# EAGLE board LEDARRAY (EAGLE 8.6.0)
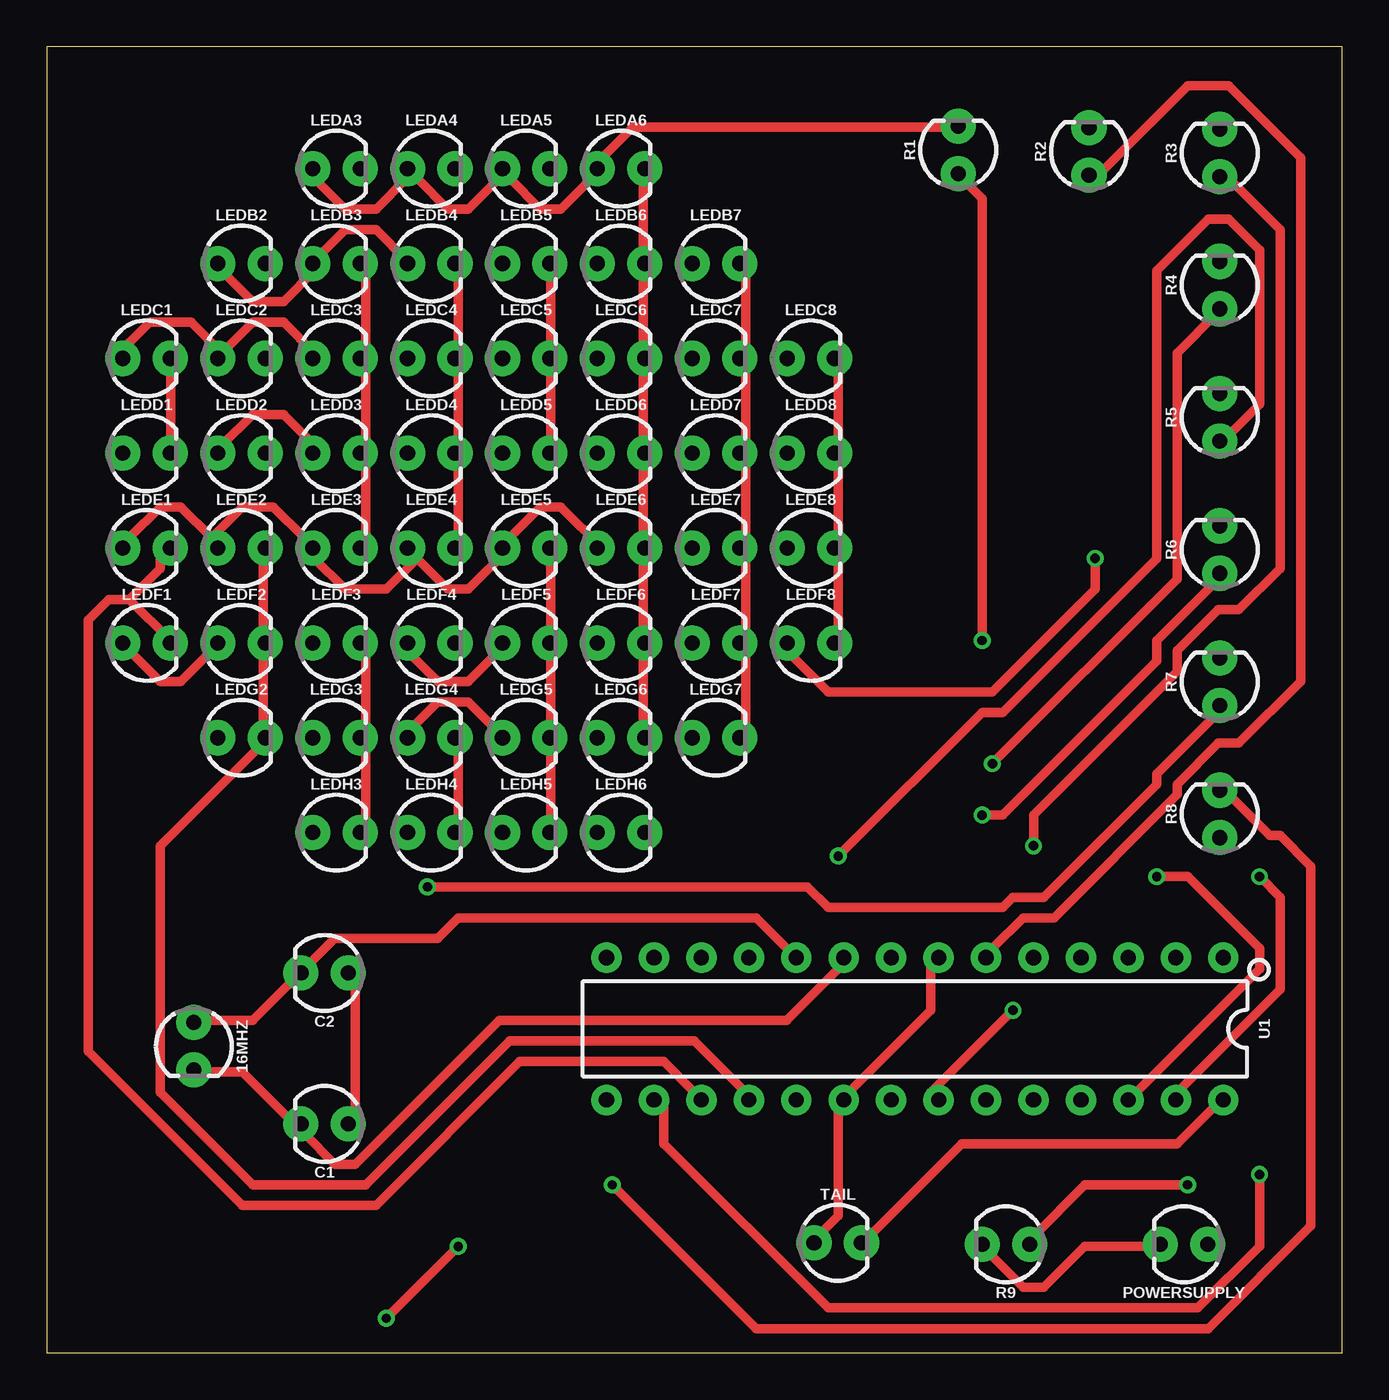
[diagram p0: board, top side]
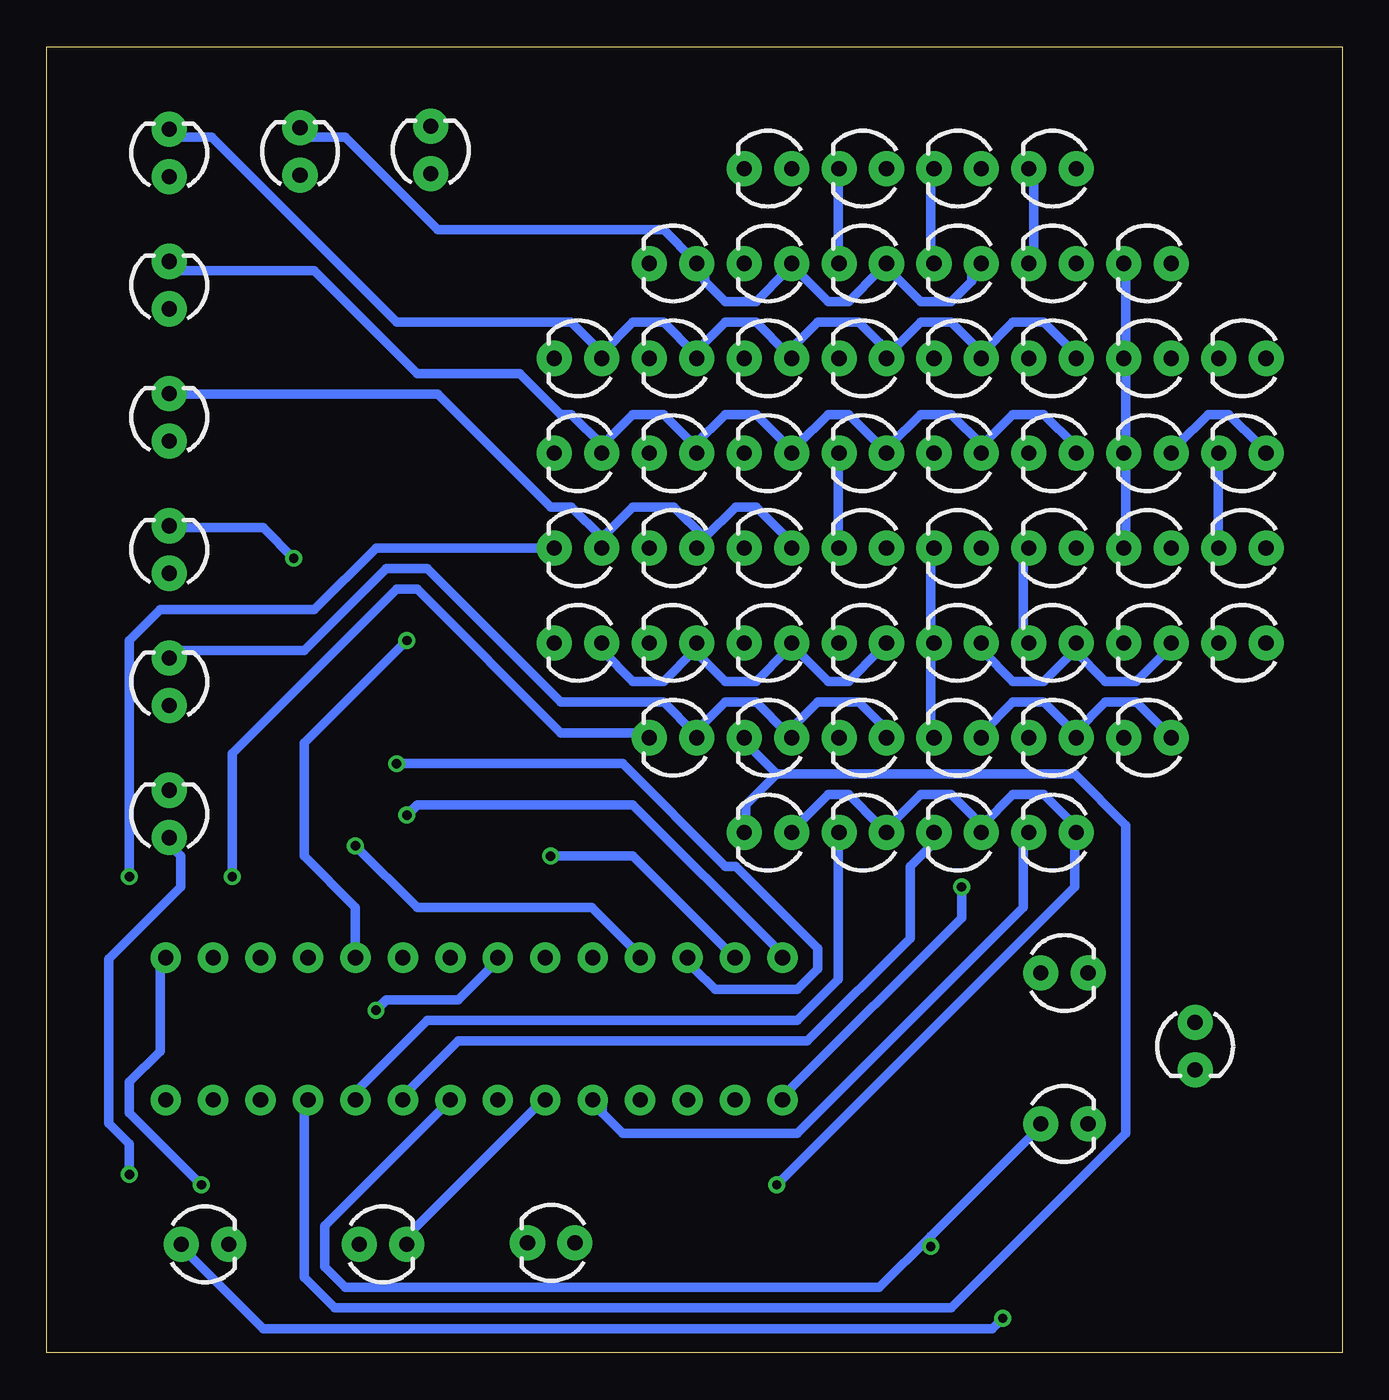
[diagram p1: board, bottom side, seen from below]

Size 69.36 x 69.95 mm. Coordinates in mm from the lower left corner, seen from the top.
Outline: 0,0 69.36,0 69.36,69.95 0,69.95 0,0
Copper layers (1*16): Top 0.035mm / dielectric 1.5mm / Bottom 0.035mm
Design rules "default *": minimum track width 0.5mm, minimum drill 0.5mm, track to track 0.6mm, track to pad 0.6mm, pad to pad 0.6mm, via to via 1.5mm, smd to smd 1mm, copper to edge 40mil, drill to drill 6mil, minimum pad ring 10mil, minimum via ring 8mil, stop-mask expansion 4mil, vias tented up to drill 0mil, thermal gap 10mil

## Footprints (pad centres in the part's own frame; a part is rotated, then mirrored left to right if it is on the bottom)
LED_3MM = drill 0.813 pad 1.88: A -1.27,0; K 1.27,0
DIP28 = drill 0.813 pad 1.626: 1 -16.51,-3.81; 2 -13.97,-3.81; 3 -11.43,-3.81; 4 -8.89,-3.81; 5 -6.35,-3.81; 6 -3.81,-3.81; 7 -1.27,-3.81; 8 1.27,-3.81; 9 3.81,-3.81; 10 6.35,-3.81; 11 8.89,-3.81; 12 11.43,-3.81; 13 13.97,-3.81; 14 16.51,-3.81; 15 16.51,3.81; 16 13.97,3.81; 17 11.43,3.81; 18 8.89,3.81; 19 6.35,3.81; 20 3.81,3.81; 21 1.27,3.81; 22 -1.27,3.81; 23 -3.81,3.81; 24 -6.35,3.81; 25 -8.89,3.81; 26 -11.43,3.81; 27 -13.97,3.81; 28 -16.51,3.81

## Placement (x,y rotation side)
16MHZ  [LED_3MM]  7.88,16.42 270 top
C1  [LED_3MM]  14.88,12.26 180 top
C2  [LED_3MM]  14.88,20.34 180 top
LEDA3  [LED_3MM]  15.51,63.42 0 top
LEDA4  [LED_3MM]  20.59,63.42 0 top
LEDA5  [LED_3MM]  25.67,63.42 0 top
LEDA6  [LED_3MM]  30.75,63.42 0 top
LEDB2  [LED_3MM]  10.43,58.34 0 top
LEDB3  [LED_3MM]  15.51,58.34 0 top
LEDB4  [LED_3MM]  20.59,58.34 0 top
LEDB5  [LED_3MM]  25.67,58.34 0 top
LEDB6  [LED_3MM]  30.75,58.34 0 top
LEDB7  [LED_3MM]  35.83,58.34 0 top
LEDC1  [LED_3MM]  5.35,53.26 0 top
LEDC2  [LED_3MM]  10.43,53.26 0 top
LEDC3  [LED_3MM]  15.51,53.26 0 top
LEDC4  [LED_3MM]  20.59,53.26 0 top
LEDC5  [LED_3MM]  25.67,53.26 0 top
LEDC6  [LED_3MM]  30.75,53.26 0 top
LEDC7  [LED_3MM]  35.83,53.26 0 top
LEDC8  [LED_3MM]  40.91,53.26 0 top
LEDD1  [LED_3MM]  5.35,48.18 0 top
LEDD2  [LED_3MM]  10.43,48.18 0 top
LEDD3  [LED_3MM]  15.51,48.18 0 top
LEDD4  [LED_3MM]  20.59,48.18 0 top
LEDD5  [LED_3MM]  25.67,48.18 0 top
LEDD6  [LED_3MM]  30.75,48.18 0 top
LEDD7  [LED_3MM]  35.83,48.18 0 top
LEDD8  [LED_3MM]  40.91,48.18 0 top
LEDE1  [LED_3MM]  5.35,43.1 0 top
LEDE2  [LED_3MM]  10.43,43.1 0 top
LEDE3  [LED_3MM]  15.51,43.1 0 top
LEDE4  [LED_3MM]  20.59,43.1 0 top
LEDE5  [LED_3MM]  25.67,43.1 0 top
LEDE6  [LED_3MM]  30.75,43.1 0 top
LEDE7  [LED_3MM]  35.83,43.1 0 top
LEDE8  [LED_3MM]  40.91,43.1 0 top
LEDF1  [LED_3MM]  5.35,38.02 0 top
LEDF2  [LED_3MM]  10.43,38.02 0 top
LEDF3  [LED_3MM]  15.51,38.02 0 top
LEDF4  [LED_3MM]  20.59,38.02 0 top
LEDF5  [LED_3MM]  25.67,38.02 0 top
LEDF6  [LED_3MM]  30.75,38.02 0 top
LEDF7  [LED_3MM]  35.83,38.02 0 top
LEDF8  [LED_3MM]  40.91,38.02 0 top
LEDG2  [LED_3MM]  10.43,32.94 0 top
LEDG3  [LED_3MM]  15.51,32.94 0 top
LEDG4  [LED_3MM]  20.59,32.94 0 top
LEDG5  [LED_3MM]  25.67,32.94 0 top
LEDG6  [LED_3MM]  30.75,32.94 0 top
LEDG7  [LED_3MM]  35.83,32.94 0 top
LEDH3  [LED_3MM]  15.51,27.86 0 top
LEDH4  [LED_3MM]  20.59,27.86 0 top
LEDH5  [LED_3MM]  25.67,27.86 0 top
LEDH6  [LED_3MM]  30.75,27.86 0 top
POWERSUPPLY  [LED_3MM]  60.88,5.81 180 top
R1  [LED_3MM]  48.8,64.42 90 top
R2  [LED_3MM]  55.8,64.34 90 top
R3  [LED_3MM]  62.8,64.26 90 top
R4  [LED_3MM]  62.8,57.18 90 top
R5  [LED_3MM]  62.8,50.1 90 top
R6  [LED_3MM]  62.8,43.02 90 top
R7  [LED_3MM]  62.8,35.94 90 top
R8  [LED_3MM]  62.8,28.86 90 top
R9  [LED_3MM]  51.35,5.81 180 top
TAIL  [LED_3MM]  42.35,5.89 0 top
U1  328P  [DIP28]  46.48,17.35 180 top

## Library data of the parts
16MHZ C1 C2 LEDA3-LEDA6 LEDB2-LEDB7 LEDC1-LEDC8 LEDD1-LEDD8 LEDE1-LEDE8 LEDF1-LEDF8 LEDG2-LEDG7 LEDH3-LEDH6 POWERSUPPLY R1-R9 TAIL = SparkFun-LED; PROD_ID: DIO-08794
U1 = SparkFun-IC-Microcontroller; PROD_ID: IC-09136

## Nets
LEDD1: LEDC1.K LEDD1.K LEDE1.K LEDF1.K U1.17
N$1: LEDC1.A LEDC2.A LEDC3.A LEDC4.A LEDC5.A LEDC6.A LEDC7.A LEDC8.A R3.K
N$2: LEDG2.A LEDG3.A LEDG4.A LEDG5.A LEDG6.A LEDG7.A R7.K
N$3: LEDF1.A LEDF2.A LEDF3.A LEDF4.A LEDF5.A LEDF6.A LEDF7.A LEDF8.A R6.K
N$4: R8.A U1.16
N$5: LEDD1.A LEDD2.A LEDD3.A LEDD4.A LEDD5.A LEDD6.A LEDD7.A LEDD8.A R4.K
N$6: LEDE1.A LEDE2.A LEDE3.A LEDE4.A LEDE5.A LEDE6.A LEDE7.A LEDE8.A R5.K
N$7: LEDH3.A LEDH4.A LEDH5.A LEDH6.A R8.K
N$8: LEDA6.K LEDB6.K LEDC6.K LEDD6.K LEDE6.K LEDF6.K LEDG6.K LEDH6.K U1.25
N$9: LEDB2.K LEDC2.K LEDD2.K LEDE2.K LEDF2.K LEDG2.K U1.18
N$10: R7.A U1.15
N$11: LEDA3.K LEDB3.K LEDC3.K LEDD3.K LEDE3.K LEDF3.K LEDG3.K LEDH3.K U1.19
N$12: LEDB2.A LEDB3.A LEDB4.A LEDB5.A LEDB6.A LEDB7.A R2.K
N$13: LEDA3.A LEDA4.A LEDA5.A LEDA6.A R1.K
N$14: LEDA5.K LEDB5.K LEDC5.K LEDD5.K LEDE5.K LEDF5.K LEDG5.K LEDH5.K U1.24
N$15: R6.A U1.14
N$16: 16MHZ.K C1.K U1.9
N$17: R9.A U1.1
N$18: R5.A U1.13
N$19: R4.A U1.12
N$20: LEDB7.K LEDC7.K LEDD7.K LEDE7.K LEDF7.K LEDG7.K U1.26
N$21: R3.A U1.11
N$22: LEDC8.K LEDD8.K LEDE8.K LEDF8.K U1.27
N$23: R2.A U1.6
N$24: R1.A U1.5
N$25: TAIL.K U1.28
N$26: POWERSUPPLY.K R9.K TAIL.A U1.7 U1.20
N$27: LEDA4.K LEDB4.K LEDC4.K LEDD4.K LEDE4.K LEDF4.K LEDG4.K LEDH4.K U1.23
N$28: 16MHZ.A C2.K U1.10
POWERSUPPLY: C1.A C2.A POWERSUPPLY.A U1.8 U1.22

## Tracks (layer width: path | path; a pad name or v marks a point on that pad's centre or on a via)
LEDD1
  Top 0.5: LEDD1.K 6.63,48.6 6.63,53 LEDC1.K | 4.43,40.35 3.33,40.35 2.23,39.25 2.23,16.15 10.48,7.9 17.63,7.9 25.33,15.6 33.03,15.6 34.68,13.95 U1.17 | 4.43,40.35 6.63,38.15 LEDF1.K | 4.43,40.35 6.08,42 6.08,43.1 LEDE1.K
  Bottom 0.5: LEDD1.K 6.63,48.05 LEDE1.K
N$1
  Top 0.5: 9.38,53.55 7.73,55.2 5.53,55.2 4.43,54.1 4.43,53.55 LEDC1.A | 9.38,53.55 11.03,55.2 12.68,55.2 14.33,53.55 LEDC3.A | 9.38,53.55 LEDC2.A
  Bottom 0.5: 19.28,53.55 17.63,55.2 15.98,55.2 14.33,53.55 LEDC3.A | 19.28,53.55 20.93,55.2 22.58,55.2 24.23,53.55 LEDC5.A 24.78,53.55 24.78,54.1 25.88,55.2 28.08,55.2 29.73,53.55 | 19.28,53.55 LEDC4.A | 29.73,53.55 31.38,55.2 33.03,55.2 34.68,53.55 | 39.63,53.55 37.98,55.2 36.33,55.2 34.68,53.55 | 34.68,53.55 LEDC7.A | 39.63,53.55 41.28,55.2 50.63,55.2 60.53,65.1 62.73,65.1 R3.K | 39.63,53.55 LEDC8.A | 29.73,53.55 LEDC6.A
N$2
  Top 0.5: LEDG5.A 24.23,33.2 22.58,34.85 20.93,34.85 19.28,33.2 LEDG4.A
  Bottom 0.5: 14.33,33.2 12.68,34.85 11.03,34.85 9.38,33.2 LEDG2.A | 14.33,33.2 15.98,34.85 17.63,34.85 19.28,33.2 LEDG4.A | 14.33,33.2 LEDG3.A | 29.73,33.2 31.38,34.85 33.03,34.85 34.68,33.2 | 34.68,33.2 36.33,34.85 41.83,34.85 48.98,42 51.18,42 55.58,37.6 62.73,37.6 R7.K | 34.68,33.2 LEDG7.A | 29.73,33.2 28.08,34.85 25.88,34.85 24.78,33.75 24.78,33.2 LEDG5.A | 29.73,33.2 LEDG6.A
N$3  (via drill 0.5)
  Top 0.5: LEDF1.A 4.43,37.6 6.08,35.95 7.18,35.95 8.83,37.6 LEDF2.A | LEDF5.A 24.23,37.6 22.58,35.95 20.93,35.95 19.28,37.6 LEDF4.A | v56.13,42.55 56.13,40.9 50.63,35.4 41.83,35.4 39.63,37.6 LEDF8.A
  Bottom 0.5: LEDF5.A 24.78,37.6 26.43,35.95 27.53,35.95 29.18,37.6 LEDF6.A 29.73,37.6 31.38,35.95 33.03,35.95 34.68,37.6 | 14.33,37.6 15.98,35.95 17.63,35.95 19.28,37.6 LEDF4.A | 14.33,37.6 12.68,35.95 11.03,35.95 9.38,37.6 LEDF2.A | 14.33,37.6 LEDF3.A | 34.68,37.6 36.33,35.95 37.98,35.95 39.63,37.6 LEDF8.A | v56.13,42.55 57.78,44.2 62.73,44.2 R6.K | 34.68,37.6 LEDF7.A
N$4  (via drill 0.5)
  Top 0.5: v64.93,9.55 64.93,5.7 61.63,2.4 41.83,2.4 33.03,11.2 33.03,13.4 U1.16
  Bottom 0.5: v64.93,9.55 64.93,11.2 66.03,12.3 66.03,21.1 62.18,24.95 62.18,26.6 62.73,27.15 R8.A
N$5
  Top 0.5: LEDD2.A 9.38,48.6 11.03,50.25 12.68,50.25 14.33,48.6 LEDD3.A
  Bottom 0.5: LEDD1.A 4.43,48.6 6.08,50.25 7.18,50.25 8.83,48.6 LEDD2.A | 19.28,48.6 17.63,50.25 15.98,50.25 14.33,48.6 LEDD3.A | 19.28,48.6 20.93,50.25 22.58,50.25 24.23,48.6 LEDD5.A 24.78,48.6 26.43,50.25 27.53,50.25 29.18,48.6 LEDD6.A 29.73,48.6 31.38,50.25 33.03,50.25 34.68,48.6 | 19.28,48.6 LEDD4.A | 34.68,48.6 36.33,50.25 37.98,50.25 39.63,48.6 | 39.63,48.6 41.28,50.25 41.83,50.25 44.03,52.45 49.53,52.45 55.03,57.95 62.73,57.95 R4.K | 39.63,48.6 LEDD8.A | 34.68,48.6 LEDD7.A
N$6
  Top 0.5: 8.83,43.65 9.38,43.1 LEDE2.A 8.83,43.65 | 8.83,43.65 7.18,45.3 6.08,45.3 4.43,43.65 4.43,43.1 LEDE1.A | 8.83,43.65 10.48,45.3 12.13,45.3 13.78,43.65 13.78,43.1 LEDE3.A 14.33,43.1 14.33,42.55 15.98,40.9 18.18,40.9 19.83,42.55 | 19.83,42.55 19.83,43.1 LEDE4.A 19.83,42.55 | 19.83,42.55 21.48,40.9 22.58,40.9 24.78,43.1 | 24.78,43.1 24.78,43.65 26.43,45.3 27.53,45.3 29.73,43.1 LEDE6.A | 24.78,43.1 LEDE5.A
  Bottom 0.5: 34.13,43.65 34.68,43.1 LEDE7.A 34.13,43.65 | 34.13,43.65 32.48,45.3 31.38,45.3 29.73,43.65 29.73,43.1 LEDE6.A | 39.63,43.65 LEDE8.A 39.63,43.65 | 39.63,43.65 37.98,45.3 35.78,45.3 34.13,43.65 | 39.63,43.65 41.28,45.3 42.38,45.3 48.43,51.35 62.73,51.35 R5.K
N$7  (via drill 0.5)
  Top 0.5: v30.28,9 37.98,1.3 62.18,1.3 67.68,6.8 67.68,26.05 66.03,27.7 65.48,27.7 63.28,29.9 R8.K
  Bottom 0.5: LEDH6.A 29.18,28.25 27.53,29.9 26.43,29.9 24.78,28.25 LEDH5.A 24.23,28.25 22.58,29.9 20.93,29.9 19.28,28.25 | 19.28,28.25 17.63,29.9 15.98,29.9 14.33,28.25 LEDH3.A 14.33,27.7 14.33,24.95 v30.28,9 | 19.28,28.25 LEDH4.A
N$8
  Top 0.5: 31.93,43.1 31.93,48.05 LEDD6.K 31.93,48.6 31.93,53 LEDC6.K 31.93,53.55 31.93,57.95 LEDB6.K 31.93,58.5 31.93,62.9 LEDA6.K | LEDG6.K 31.93,33.2 31.93,37.6 LEDF6.K 31.93,38.15 31.93,43.1 | 31.93,43.1 LEDE6.K
  Bottom 0.5: 30.28,31 14.33,31 11.58,28.25 11.58,11.75 20.93,2.4 53.93,2.4 55.58,4.05 55.58,13.4 U1.25 | 30.28,31 31.93,32.65 LEDG6.K | 30.28,31 31.93,29.35 31.93,28.25 LEDH6.K
N$9
  Top 0.5: U1.18 37.43,13.95 34.68,16.7 24.78,16.7 17.08,9 11.03,9 6.08,13.95 6.08,27.15 11.58,32.65 LEDG2.K 11.58,33.2 11.58,37.6 LEDF2.K 11.58,38.15 11.58,43.1 LEDE2.K
  Bottom 0.5: LEDB2.K 11.58,57.95 11.58,53.55 LEDC2.K 11.58,53 11.58,48.6 LEDD2.K 11.58,48.05 11.58,43.1 LEDE2.K
N$10  (via drill 0.5)
  Top 0.5: v20.38,24.95 40.73,24.95 41.83,23.85 51.18,23.85 51.73,24.4 53.38,24.4 59.43,30.45 59.43,31 62.73,34.3 R7.A
  Bottom 0.5: v20.38,24.95 20.38,23.3 29.73,13.95 U1.15
N$11
  Top 0.5: LEDE3.K 17.08,43.1 17.08,48.05 LEDD3.K 17.08,48.6 17.08,53 LEDC3.K 17.08,53.55 17.08,57.95 LEDB3.K | LEDF3.K 17.08,37.6 17.08,33.2 LEDG3.K 17.08,32.65 17.08,28.25 LEDH3.K
  Bottom 0.5: LEDA3.K 16.53,62.9 16.53,58.5 LEDB3.K | U1.19 39.63,13.4 39.63,12.85 38.53,11.75 29.18,11.75 17.08,23.85 17.08,27.7 LEDH3.K | LEDE3.K 17.08,43.1 17.08,38.15 LEDF3.K
N$12
  Top 0.5: LEDB2.A 9.38,57.95 11.03,56.3 12.68,56.3 14.33,57.95 LEDB3.A 14.33,58.5 15.98,60.15 17.63,60.15 19.28,58.5 LEDB4.A
  Bottom 0.5: R2.K 55.58,65.1 53.38,65.1 48.43,60.15 36.33,60.15 34.68,58.5 LEDB7.A 34.13,57.95 34.13,57.4 33.03,56.3 31.38,56.3 29.73,57.95 LEDB6.A 29.18,57.95 27.53,56.3 26.43,56.3 24.78,57.95 LEDB5.A 24.23,57.95 22.58,56.3 20.93,56.3 19.83,57.4 19.83,57.95 LEDB4.A
N$13
  Top 0.5: LEDA3.A 14.33,62.9 15.98,61.25 17.63,61.25 19.28,62.9 LEDA4.A 19.83,62.9 21.48,61.25 22.58,61.25 24.23,62.9 LEDA5.A 24.78,62.9 26.43,61.25 27.53,61.25 29.18,62.9 LEDA6.A 29.18,63.45 31.38,65.65 48.43,65.65 R1.K
N$14
  Top 0.5: LEDD5.K 26.98,48.6 26.98,53 LEDC5.K 26.98,53.55 26.98,57.95 LEDB5.K | LEDE5.K 26.98,43.1 26.98,38.15 LEDF5.K 26.98,37.6 26.98,33.2 LEDG5.K 26.98,32.65 26.98,28.25 LEDH5.K
  Bottom 0.5: LEDB5.K 26.98,58.5 26.98,62.9 LEDA5.K | U1.24 52.83,13.95 48.98,17.8 29.18,17.8 26.98,20 26.98,27.7 LEDH5.K | LEDD5.K 26.98,48.05 26.98,43.1 LEDE5.K
N$15  (via drill 0.5)
  Top 0.5: v50.08,28.8 51.18,28.8 59.43,37.05 59.43,38.15 62.73,41.45 R6.A
  Bottom 0.5: v50.08,28.8 49.53,29.35 37.98,29.35 30.28,21.65 U1.14
N$16
  Top 0.5: U1.9 42.38,21.1 42.38,20.55 39.63,17.8 24.23,17.8 16.53,10.1 15.43,10.1 13.78,11.75 C1.K 13.23,12.3 10.48,15.05 8.28,15.05 16MHZ.K
N$17  (via drill 0.5)
  Top 0.5: v61.08,9 55.58,9 52.83,6.25 R9.A
  Bottom 0.5: v61.08,9 64.93,12.85 64.93,14.5 63.28,16.15 63.28,21.1 U1.1
N$18  (via drill 0.5)
  Top 0.5: v42.38,26.6 50.08,34.3 51.18,34.3 59.43,42.55 59.43,57.95 62.18,60.7 63.28,60.7 64.93,59.05 64.93,50.8 63.28,49.15 R5.A
  Bottom 0.5: v42.38,26.6 37.98,26.6 33.03,21.65 U1.13
N$19  (via drill 0.5)
  Top 0.5: v50.63,31.55 60.53,41.45 60.53,53.55 62.73,55.75 R4.A
  Bottom 0.5: v50.63,31.55 38.53,31.55 33.03,26.05 32.48,26.05 28.08,21.65 28.08,20.55 29.18,19.45 33.58,19.45 34.68,20.55 34.68,21.1 U1.12
N$20  (via drill 0.5)
  Top 0.5: 37.43,43.1 37.43,48.05 LEDD7.K 37.43,48.6 37.43,53 LEDC7.K 37.43,53.55 37.43,57.95 LEDB7.K | v59.43,25.5 61.08,25.5 64.93,21.65 64.93,20.55 58.33,13.95 U1.26 | LEDG7.K 37.43,33.2 37.43,37.6 LEDF7.K 37.43,38.15 37.43,43.1 | 37.43,43.1 LEDE7.K
  Bottom 0.5: v59.43,25.5 59.43,32.1 50.63,40.9 49.53,40.9 41.83,33.2 37.43,33.2 LEDG7.K
N$21  (via drill 0.5)
  Top 0.5: v52.83,27.15 52.83,28.8 60.53,36.5 60.53,37.6 62.73,39.8 63.83,39.8 66.03,42 66.03,60.15 63.28,62.9 R3.A
  Bottom 0.5: v52.83,27.15 49.53,23.85 40.18,23.85 37.98,21.65 U1.11
N$22  (via drill 0.5)
  Top 0.5: LEDC8.K 42.38,53 42.38,48.6 LEDD8.K 42.38,48.05 42.38,43.1 | v64.93,25.5 66.03,24.4 66.03,19.45 60.53,13.95 U1.27 | 42.38,43.1 42.38,38.15 LEDF8.K | 42.38,43.1 LEDE8.K
  Bottom 0.5: v64.93,25.5 64.93,38.15 63.28,39.8 55.03,39.8 51.73,43.1 LEDE8.K
N$23
  Top 0.5: U1.6 50.63,21.65 52.28,23.3 53.93,23.3 60.53,29.9 60.53,30.45 62.73,32.65 63.83,32.65 67.13,35.95 67.13,64 63.28,67.85 61.08,67.85 56.13,62.9 R2.A
N$24  (via drill 0.5)
  Top 0.5: v50.08,38.15 50.08,61.8 48.98,62.9 R1.A
  Bottom 0.5: U1.5 52.83,23.85 55.58,26.6 55.58,32.65 v50.08,38.15
N$25
  Top 0.5: U1.28 62.73,13.4 60.53,11.2 48.98,11.2 44.03,6.25 TAIL.K
N$26
  Top 0.5: TAIL.A 41.28,6.25 42.38,7.35 42.38,13.4 U1.20 42.93,13.95 47.33,18.35 47.33,21.1 U1.7 | POWERSUPPLY.K 59.43,5.7 55.58,5.7 53.38,3.5 52.28,3.5 50.08,5.7 R9.K
  Bottom 0.5: R9.K 50.08,6.25 42.93,13.4 U1.20
N$27
  Top 0.5: LEDE4.K 22.03,43.1 22.03,48.05 LEDD4.K 22.03,48.6 22.03,53 LEDC4.K 22.03,53.55 22.03,57.95 LEDB4.K | LEDG4.K 22.03,32.65 22.03,28.25 LEDH4.K
  Bottom 0.5: LEDA4.K 22.03,62.9 22.03,58.5 LEDB4.K | LEDG4.K 22.03,33.2 22.03,37.6 LEDF4.K 22.03,38.15 22.03,43.1 LEDE4.K | U1.23 50.08,13.95 47.33,16.7 28.63,16.7 23.13,22.2 23.13,26.05 21.48,27.7 LEDH4.K
N$28
  Top 0.5: U1.10 39.63,21.65 37.98,23.3 22.03,23.3 20.93,22.2 15.43,22.2 13.78,20.55 C2.K 13.23,20 11.03,17.8 8.28,17.8 16MHZ.A
POWERSUPPLY  (via drill 0.5)
  Top 0.5: v51.73,18.35 47.33,13.95 U1.22 | v22.03,5.7 v18.18,1.85 | C2.A 16.53,20 16.53,12.3 C1.A
  Bottom 0.5: 22.03,6.25 16.53,11.75 C1.A | 22.03,6.25 24.78,3.5 53.38,3.5 54.48,4.6 54.48,6.8 47.88,13.4 U1.22 | v51.73,18.35 51.18,18.9 47.33,18.9 45.68,20.55 45.68,21.1 U1.8 | v18.18,1.85 18.73,1.3 57.78,1.3 61.63,5.15 61.63,5.7 POWERSUPPLY.A | 22.03,6.25 v22.03,5.7